# Altium PCB SPI-主板-开关.PcbDoc (part 5 of 11)
Units mm, origin at the board's own origin, x right, y up, seen from the top; angles counter-clockwise.
Board outline 97.69 x 103.45 mm, 2 copper layers (Top Layer, Bottom Layer); 86 components, 63 nets, 260 pads, 250 vias.
Unrouted connection lines stored in the file: 6.
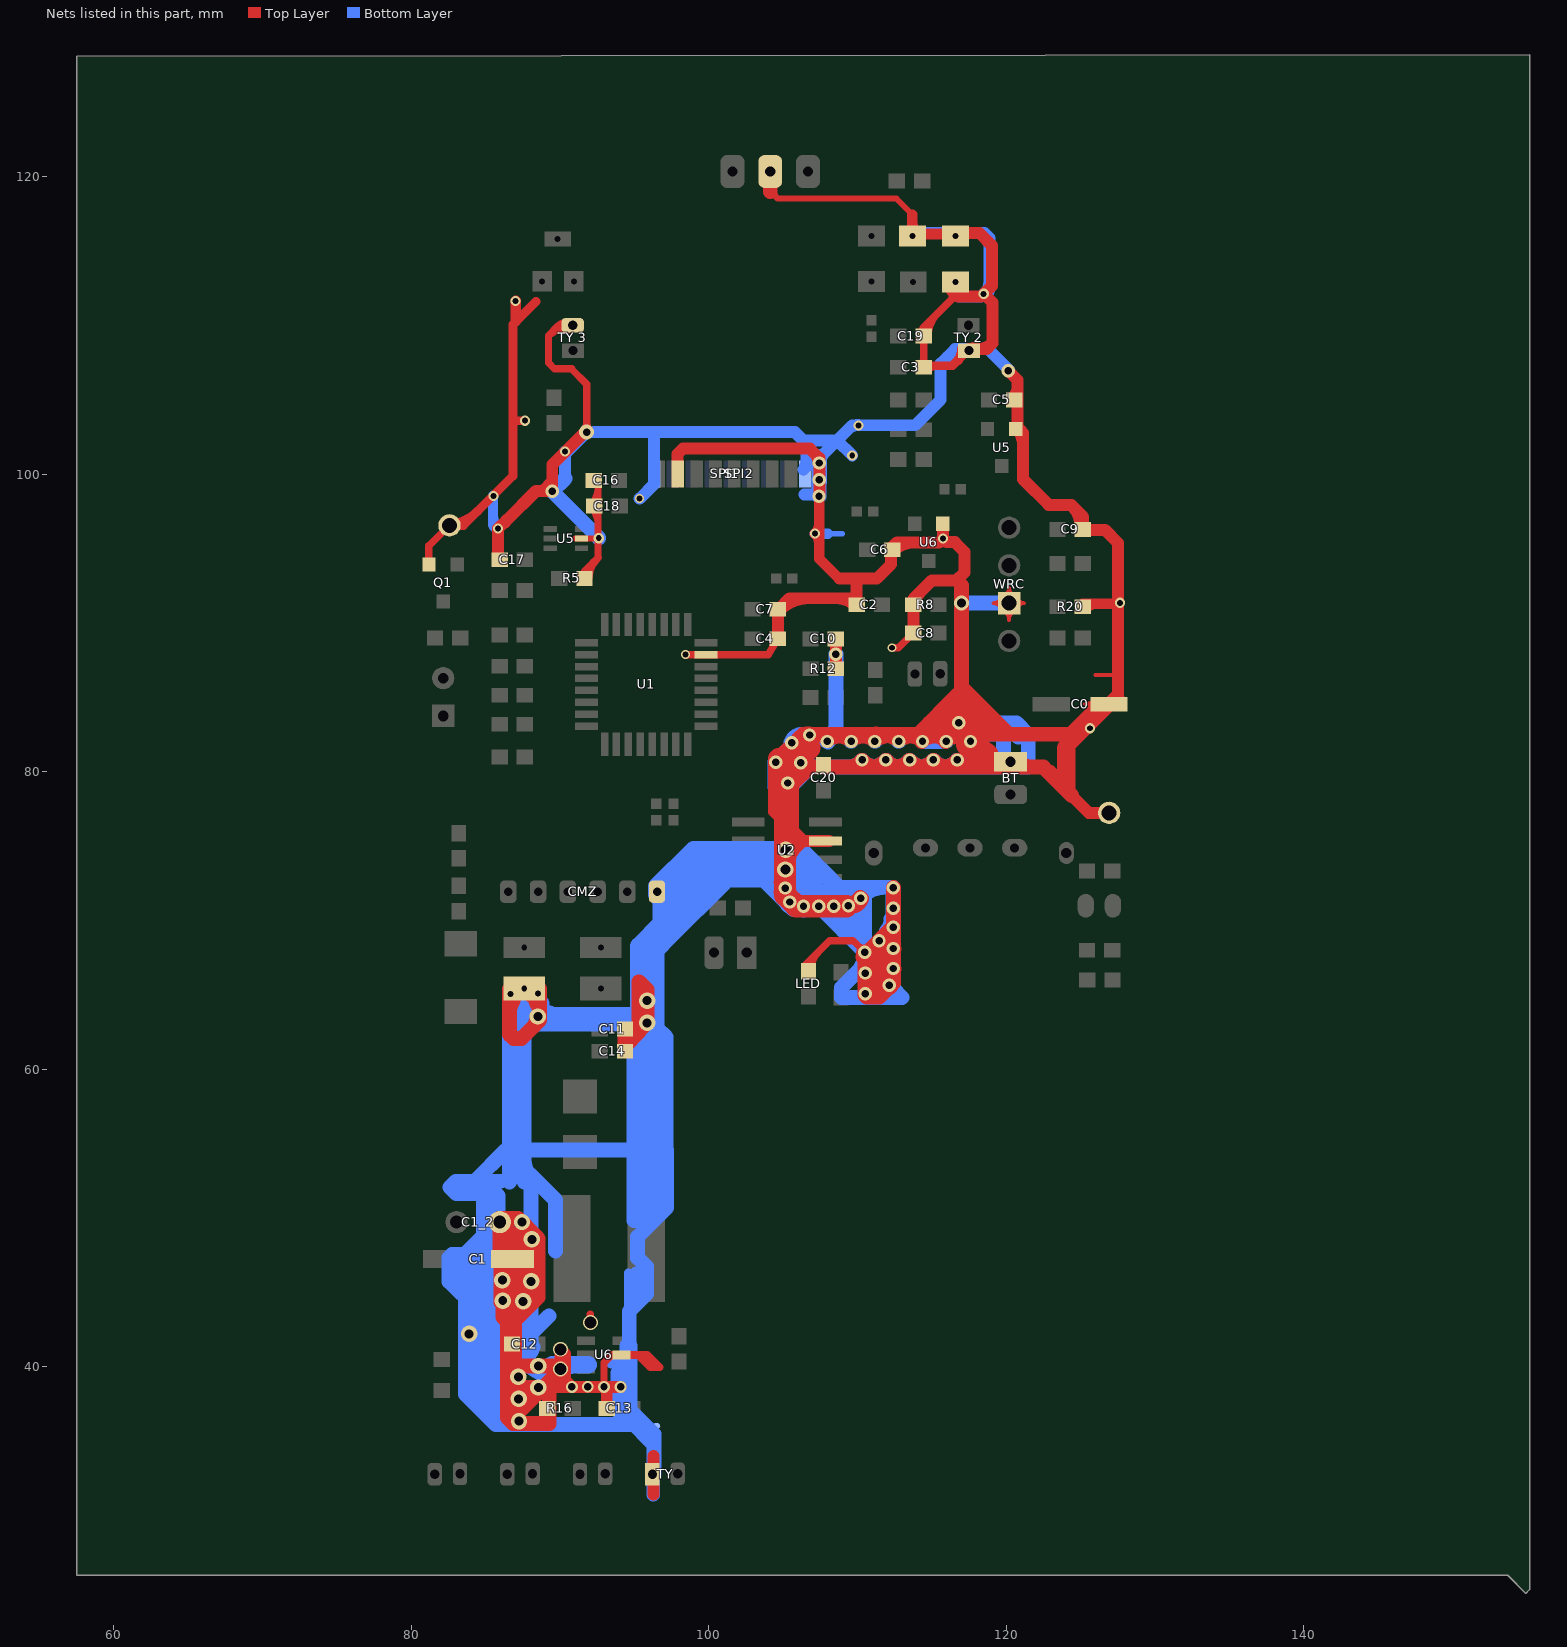
[diagram p5: the nets of this part, all layers, seen from the top]

## Via types
v1: diameter 0.9, hole 0.5, Top Layer to Bottom Layer, 104 vias
v2: diameter 0.68, hole 0.4, Top Layer to Bottom Layer, 100 vias
v3: diameter 1.1, hole 0.6, Top Layer to Bottom Layer, tented both sides, 16 vias
v4: diameter 1, hole 0.8, Top Layer to Bottom Layer, tented both sides, 8 vias
v5: diameter 1, hole 0.6, Top Layer to Bottom Layer, 4 vias
v6: diameter 0.8, hole 0.5, Top Layer to Bottom Layer, 4 vias
v7: diameter 0.7, hole 0.4, Top Layer to Bottom Layer, 4 vias
v8: diameter 0.6, hole 0.4, Top Layer to Bottom Layer, 3 vias
v9: diameter 1.1, hole 0.68, Top Layer to Bottom Layer, 2 vias
v10: diameter 0.8, hole 0.4, Top Layer to Bottom Layer, 2 vias
v11: diameter 1, hole 0.5, Top Layer to Bottom Layer, 1 vias
v12: diameter 0.9, hole 0.6, Top Layer to Bottom Layer, tented bottom, 1 vias
v13: diameter 1.2, hole 0.68, Top Layer to Bottom Layer, 1 vias

## Nets (pads, with @x,y where several pads share a name; then routed paths per layer and width w, separated by ;. In a path a pad name is that pad's centre, name@x,y a point inside that pad or via, vN(x,y) a via of type N, cw(c..) or ccw(c..) an arc to the next point about the centre after c; other vN are vias at no path point) (continued)
GND: (continued)
  Top Layer w0.5: Q1.2@81.194,93.782 81.194,95.189 pad.4@82.575,96.571 ; 90.855,109.919 89.826,109.919 89.23,109.323 ; R5.1@91.65,93 91.65,93.479 92.583,94.412 ; v11(91.796,102.845) 91.796,106.07 90.78,107.086 89.637,107.086 89.23,107.493 89.23,109.323 ; R5.1@91.938,93.077 cw(c92.56,93.277) 92.098,93.739 ; v4(92.05,42.977) 92.05,43.536 ; 92.56,94.412 C16.1@92.56,99.441 ; v6(92.964,38.643) 92.964,40.272 93.496,40.804 95.873,40.804 96.723,39.954 96.063,39.954 95.25,40.767 U6.2@94.539,40.767 ; v1@104.369,80.366 104.572,80.366 v1@106.731,82.525 ; v1@104.582,80.835 ccw(c104.743,81.333) 105.112,80.963 ; 104.648,72.252 104.648,76.86 104.242,77.267 v1@104.242,80.518 ; v1@104.711,80.706 cw(c105.209,80.867) 104.839,81.236 ; v1@104.716,80.6 cw(c105.731,80.363) 105.21,81.266 ; 104.963,72.83 ccw(c105.485,72.83) v1@105.247,72.365 ; 105.134,81.431 cw(c105.657,81.194) v1@105.606,81.767 ; 105.27,81.374 ccw(c104.9,81.744) v1@105.397,81.904 ; v1@105.557,82.163 ccw(c105.422,83.014) 106.167,82.583 ; v1@105.694,82.135 ccw(c105.921,82.494) 106.171,82.151 ; 106.104,82.335 ccw(c106.45,81.735) v1@105.781,81.914 ; 106.298,82.184 cw(c106.573,81.962) v1@106.706,82.289 ; LED.1@106.45,66.75 106.45,66.953 108.153,68.656 109.703,68.656 v1(110.49,67.869) ; LED.1@106.838,66.727 cw(c107.46,66.927) 106.998,67.389 ; v1@109.753,81.951 cw(c110.218,81.713) 110.218,82.235 ; v8(112.319,88.341) 112.759,88.341 C8.1@113.75,89.332 ; pad.0@113.65,116.032 pad.0@113.7,116.032 ; pad.0@113.855,116.032 pad.0@116.6,116.032 ; v1@114.553,81.951 cw(c115.018,81.713) 115.018,82.235 ; pad.0@116.4,112.59 pad.0@116.6,112.932 116.605,112.831 116.605,112.822 pad.0@116.4,112.822 ; 116.459,82.779 117.831,82.779 ; 118.059,82.525 116.205,82.525 ; 118.059,82.537 116.218,82.537 ; 123.034,80.217 124.409,78.842 ; 124.206,81.839 124.409,81.636 124.409,78.842 ; 124.231,82.525 124.117,82.639 ; 124.409,78.41 124.409,78.842 ; 125.12,83.033 124.003,81.915 124.003,82.525 ; C0.2@126.924,84.633 C0.2@126.913,84.622 ; 89.23,109.323 cw(c90.2,108.353) 90.487,109.694 ; 89.23,109.323 cw(c90.2,108.353) 90.487,109.694 ; 89.23,109.323 cw(c90.2,108.353) 90.487,109.694 ; 89.88,109.973 cw(c90.429,109.424) 90.592,110.183 ; 89.88,109.973 cw(c90.429,109.424) 90.592,110.183 ; 89.88,109.973 cw(c90.429,109.424) 90.592,110.183 ; 89.98,109.919 ccw(c89.98,110.474) 90.373,110.082 ; 89.98,109.919 cw(c89.98,109.364) 90.373,109.757 ; 89.98,109.919 ccw(c89.98,110.474) 90.373,110.082 ; 89.98,109.919 cw(c89.98,109.364) 90.373,109.757 ; 89.98,109.919 ccw(c89.98,110.474) 90.373,110.082 ; 89.98,109.919 cw(c89.98,109.364) 90.373,109.757 ; R5.1@91.575,93.217 ccw(c90.861,94.453) 92.24,94.084 ; R5.1@91.575,93.217 ccw(c90.861,94.453) 92.24,94.084 ; R5.1@91.575,93.217 ccw(c90.861,94.453) 92.24,94.084 ; v11@91.619,103.021 ccw(c91.192,103.448) 91.796,103.448 ; v11@91.619,103.021 ccw(c91.192,103.448) 91.796,103.448 ; v11@91.619,103.021 ccw(c91.192,103.448) 91.796,103.448 ; 91.796,103.448 ccw(c92.399,103.448) v11@91.972,103.021 ; 91.796,103.448 ccw(c92.399,103.448) v11@91.972,103.021 ; 91.796,103.448 ccw(c92.399,103.448) v11@91.972,103.021 ; R5.1@91.95,93 cw(c93.83,93) 92.501,94.329 ; R5.1@91.95,93 cw(c93.83,93) 92.501,94.329 ; R5.1@91.95,93 cw(c93.83,93) 92.501,94.329 ; C18.1@92.19,97.689 cw(c91.298,96.797) 92.56,96.797 ; C18.1@92.19,97.689 cw(c91.298,96.797) 92.56,96.797 ; C18.1@92.19,97.689 cw(c91.298,96.797) 92.56,96.797 ; C18.1@92.19,98.043 ccw(c91.298,98.935) 92.56,98.935 ; C18.1@92.19,98.043 ccw(c91.298,98.935) 92.56,98.935 ; C18.1@92.19,98.043 ccw(c91.298,98.935) 92.56,98.935 ; 92.447,97.245 cw(c92.738,97.413) C18.1@92.526,97.673 ; 92.447,97.245 cw(c92.738,97.413) C18.1@92.526,97.673 ; 92.447,97.245 cw(c92.738,97.413) C18.1@92.526,97.673 ; 92.447,98.488 ccw(c92.738,98.32) C18.1@92.526,98.06 ; 92.447,98.488 ccw(c92.738,98.32) C18.1@92.526,98.06 ; 92.447,98.488 ccw(c92.738,98.32) C18.1@92.526,98.06 ; 104.242,79.488 cw(c105.678,79.488) v1@104.662,80.504 ; 104.242,79.488 cw(c105.678,79.488) v1@104.662,80.504 ; 104.242,79.488 cw(c105.678,79.488) v1@104.662,80.504 ; v1@104.242,80.518 104.242,80.772 106.248,82.779 ; v1@104.242,80.518 106.248,82.525 ; 104.346,79.956 ccw(c103.834,80.252) v1@104.347,80.546 ; 104.346,79.956 ccw(c103.834,80.252) v1@104.347,80.546 ; 104.346,79.956 ccw(c103.834,80.252) v1@104.347,80.546 ; v1@104.421,80.818 ccw(c103.85,81.808) 104.953,81.512 ; v1@104.421,80.818 ccw(c103.85,81.808) 104.953,81.512 ; v1@104.421,80.818 ccw(c103.85,81.808) 104.953,81.512 ; v1@104.469,80.838 ccw(c104.097,82.226) 105.342,81.508 ; v1@104.469,80.838 ccw(c104.097,82.226) 105.342,81.508 ; v1@104.469,80.838 ccw(c104.097,82.226) 105.342,81.508 ; v1@104.521,80.845 ccw(c104.521,82.125) 105.426,81.22 ; v1@104.521,80.845 ccw(c104.521,82.125) 105.426,81.22 ; v1@104.521,80.845 ccw(c104.521,82.125) 105.426,81.22 ; 104.599,72.572 ccw(c104.969,72.786) v1@105.097,72.378 ; 104.599,72.572 ccw(c104.969,72.786) v1@105.097,72.378 ; 104.599,72.572 ccw(c104.969,72.786) v1@105.097,72.378 ; 104.603,71.917 cw(c105.345,71.772) v1@105.032,72.46 ; 104.603,71.917 cw(c105.345,71.772) v1@105.032,72.46 ; 104.603,71.917 cw(c105.345,71.772) v1@105.032,72.46 ; 104.603,71.917 cw(c105.345,71.772) v1@105.032,72.46 ; 104.603,71.917 cw(c105.345,71.772) v1@105.032,72.46 ; 104.603,71.917 cw(c105.345,71.772) v1@105.032,72.46 ; 104.626,72.034 cw(c105.177,71.926) v1@105.132,72.486 ; 104.626,72.034 cw(c105.177,71.926) v1@105.132,72.486 ; 104.626,72.034 cw(c105.177,71.926) v1@105.132,72.486 ; 104.626,72.034 cw(c105.177,71.926) v1@105.132,72.486 ; 104.626,72.034 cw(c105.177,71.926) v1@105.132,72.486 ; 104.626,72.034 cw(c105.177,71.926) v1@105.132,72.486 ; 104.635,73.948 ccw(c105.028,74.175) v9@105.105,73.727 ; 104.635,73.948 ccw(c105.028,74.175) v9@105.105,73.727 ; 104.635,73.948 ccw(c105.028,74.175) v9@105.105,73.727 ; 104.638,74.197 cw(c105.089,73.937) v9@105.148,74.454 ; 104.638,74.197 cw(c105.089,73.937) v9@105.148,74.454 ; 104.638,74.197 cw(c105.089,73.937) v9@105.148,74.454 ; 104.638,75.307 ccw(c105.089,75.568) v9@105.148,75.05 ; 104.638,75.307 ccw(c105.089,75.568) v9@105.148,75.05 ; 104.638,75.307 ccw(c105.089,75.568) v9@105.148,75.05 ; 104.648,72.147 cw(c105.772,72.147) v9@105.286,73.161 ; 104.648,72.147 cw(c105.772,72.147) v9@105.286,73.161 ; 104.648,72.147 cw(c105.772,72.147) v9@105.286,73.161 ; 104.648,72.689 ccw(c105.658,72.689) v1@104.944,71.975 ; 104.648,72.689 ccw(c105.658,72.689) v1@104.944,71.975 ; 104.648,72.689 ccw(c105.658,72.689) v1@104.944,71.975 ; 104.648,72.74 cw(c107.193,72.74) v9@105.394,74.54 ; 104.648,72.74 cw(c107.193,72.74) v9@105.394,74.54 ; 104.648,72.74 cw(c107.193,72.74) v9@105.394,74.54 ; 104.648,72.942 cw(c105.391,72.942) v9@105.069,73.612 ; 104.648,72.942 cw(c105.391,72.942) v9@105.069,73.612 ; 104.648,72.942 cw(c105.391,72.942) v9@105.069,73.612 ; 104.648,73.896 ccw(c106.865,73.896) v1@105.297,72.328 ; 104.648,73.896 ccw(c106.865,73.896) v1@105.297,72.328 ; 104.648,73.896 ccw(c106.865,73.896) v1@105.297,72.328 ; 104.648,73.947 cw(c105.986,73.947) v9@105.04,74.894 ; 104.648,73.947 cw(c105.986,73.947) v9@105.04,74.894 ; 104.648,73.947 cw(c105.986,73.947) v9@105.04,74.894 ; 104.648,74.175 ccw(c105.9,74.175) v9@105.015,73.29 ; 104.648,74.175 ccw(c105.9,74.175) v9@105.015,73.29 ; 104.648,74.175 ccw(c105.9,74.175) v9@105.015,73.29 ; 104.648,75.382 ccw(c107.107,75.382) v9@105.368,73.644 ; 104.648,75.382 ccw(c107.107,75.382) v9@105.368,73.644 ; 104.648,75.382 ccw(c107.107,75.382) v9@105.368,73.644 ; 104.648,75.557 ccw(c105.986,75.557) v9@105.04,74.611 ; 104.648,75.557 ccw(c105.986,75.557) v9@105.04,74.611 ; 104.648,75.557 ccw(c105.986,75.557) v9@105.04,74.611 ; 104.648,76.764 ccw(c107.193,76.764) v9@105.394,74.964 ; 104.648,76.764 ccw(c107.193,76.764) v9@105.394,74.964 ; 104.648,76.764 ccw(c107.193,76.764) v9@105.394,74.964 ; 104.662,75.279 ccw(c105.689,75.417) v9@105.06,74.593 ; 104.662,75.279 ccw(c105.689,75.417) v9@105.06,74.593 ; 104.662,75.279 ccw(c105.689,75.417) v9@105.06,74.593 ; 104.684,72.997 cw(c105.578,72.87) v9@105.036,73.591 ; 104.684,72.997 cw(c105.578,72.87) v9@105.036,73.591 ; 104.684,72.997 cw(c105.578,72.87) v9@105.036,73.591 ; 104.684,72.997 cw(c105.578,72.87) v9@105.036,73.591 ; 104.684,72.997 cw(c105.578,72.87) v9@105.036,73.591 ; 104.684,72.997 cw(c105.578,72.87) v9@105.036,73.591 ; v1@104.694,80.545 cw(c105.684,79.974) 105.388,81.077 ; v1@104.694,80.545 cw(c105.684,79.974) 105.388,81.077 ; v1@104.694,80.545 cw(c105.684,79.974) 105.388,81.077 ; v1@104.721,80.645 cw(c105.572,80.645) 104.97,81.247 ; v1@104.721,80.645 cw(c106.185,80.645) 105.15,81.68 ; v1@104.721,80.645 cw(c105.572,80.645) 104.97,81.247 ; v1@104.721,80.645 cw(c106.185,80.645) 105.15,81.68 ; v1@104.721,80.645 cw(c105.572,80.645) 104.97,81.247 ; v1@104.721,80.645 cw(c106.185,80.645) 105.15,81.68 ; 104.81,72.753 ccw(c104.54,73.068) v9@104.898,73.279 ; 104.81,72.753 ccw(c104.54,73.068) v9@104.898,73.279 ; 104.81,72.753 ccw(c104.54,73.068) v9@104.898,73.279 ; v9@104.815,74.601 cw(c103.792,74.01) v9@104.88,73.549 ; v9@104.815,74.601 cw(c103.792,74.01) v9@104.88,73.549 ; v9@104.815,74.601 cw(c103.792,74.01) v9@104.88,73.549 ; v9@104.818,73.544 ccw(c103.716,74.18) v9@104.902,74.643 ; v9@104.818,73.544 ccw(c103.716,74.18) v9@104.902,74.643 ; v9@104.818,73.544 ccw(c103.716,74.18) v9@104.902,74.643 ; 104.818,75.96 cw(c103.716,75.324) v9@104.902,74.861 ; 104.818,75.96 cw(c103.716,75.324) v9@104.902,74.861 ; 104.818,75.96 cw(c103.716,75.324) v9@104.902,74.861 ; v1@104.833,80.627 ccw(c103.495,81.966) v1@105.388,81.966 ; v1@104.833,80.627 ccw(c103.495,81.966) v1@105.388,81.966 ; v1@104.833,80.627 ccw(c103.495,81.966) v1@105.388,81.966 ; v9@104.849,73.105 cw(c103.859,72.534) v1@104.963,72.239 ; v9@104.849,73.105 cw(c103.859,72.534) v1@104.963,72.239 ; v9@104.849,73.105 cw(c103.859,72.534) v1@104.963,72.239 ; 104.856,81.171 cw(c105.974,80.526) v1@105.64,81.773 ; 104.856,81.171 cw(c105.974,80.526) v1@105.64,81.773 ; 104.856,81.171 cw(c105.974,80.526) v1@105.64,81.773 ; 104.856,81.171 cw(c105.974,80.526) v1@105.64,81.773 ; 104.856,81.171 cw(c105.974,80.526) v1@105.64,81.773 ; 104.856,81.171 cw(c105.974,80.526) v1@105.64,81.773 ; 104.965,81.383 ccw(c104.527,82.141) v1@105.39,81.998 ; 104.965,81.383 ccw(c104.527,82.141) v1@105.39,81.998 ; 104.965,81.383 ccw(c104.527,82.141) v1@105.39,81.998 ; 104.965,81.383 ccw(c104.527,82.141) v1@105.39,81.998 ; 104.986,81.517 cw(c105.588,80.915) v1@105.588,81.766 ; 104.986,81.517 cw(c105.588,80.915) v1@105.588,81.766 ; 104.986,81.517 cw(c105.588,80.915) v1@105.588,81.766 ; 105.009,81.54 cw(c106.782,79.767) v1@106.782,82.274 ; 105.009,81.54 cw(c106.782,79.767) v1@106.782,82.274 ; 105.009,81.54 cw(c106.782,79.767) v1@106.782,82.274 ; 105.082,81.562 cw(c105.458,81.345) v1@105.547,81.77 ; 105.082,81.562 cw(c105.458,81.345) v1@105.547,81.77 ; 105.082,81.562 cw(c105.458,81.345) v1@105.547,81.77 ; 105.082,81.562 cw(c105.458,81.345) v1@105.547,81.77 ; 105.082,81.562 cw(c105.458,81.345) v1@105.547,81.77 ; 105.082,81.562 cw(c105.458,81.345) v1@105.547,81.77 ; 105.156,81.099 cw(c106.259,80.803) v1@105.688,81.793 ; 105.156,81.099 cw(c106.259,80.803) v1@105.688,81.793 ; 105.156,81.099 cw(c106.259,80.803) v1@105.688,81.793 ; 105.175,81.451 ccw(c104.66,81.966) v1@105.388,81.966 ; 105.175,81.451 ccw(c104.66,81.966) v1@105.388,81.966 ; 105.175,81.451 ccw(c104.66,81.966) v1@105.388,81.966 ; 105.181,81.669 cw(c105.489,81.26) v1@105.56,81.768 ; 105.181,81.669 cw(c105.489,81.26) v1@105.56,81.768 ; 105.181,81.669 cw(c105.489,81.26) v1@105.56,81.768 ; 105.214,81.694 ccw(c104.941,82.056) v1@105.39,81.993 ; 105.214,81.694 ccw(c104.941,82.056) v1@105.39,81.993 ; 105.214,81.694 ccw(c104.941,82.056) v1@105.39,81.993 ; v9@105.255,73.839 cw(c105.721,74.11) v9@105.374,74.523 ; v9@105.255,73.839 cw(c105.721,74.11) v9@105.374,74.523 ; v9@105.255,73.839 cw(c105.721,74.11) v9@105.374,74.523 ; v9@105.293,74.37 ccw(c105.821,74.058) v9@105.374,73.637 ; v9@105.293,74.37 ccw(c105.821,74.058) v9@105.374,73.637 ; v9@105.293,74.37 ccw(c105.821,74.058) v9@105.374,73.637 ; v9@105.293,74.37 ccw(c105.821,74.058) v9@105.374,73.637 ; v9@105.293,74.37 ccw(c105.821,74.058) v9@105.374,73.637 ; v9@105.293,74.37 ccw(c105.821,74.058) v9@105.374,73.637 ; v1@105.443,81.719 cw(c106.782,80.381) v1@106.782,82.274 ; v1@105.443,81.719 cw(c106.782,80.381) v1@106.782,82.274 ; v1@105.443,81.719 cw(c106.782,80.381) v1@106.782,82.274 ; v1@105.541,81.669 ccw(c105.631,82.237) 106.037,81.831 ; v1@105.541,81.669 ccw(c105.631,82.237) 106.037,81.831 ; v1@105.541,81.669 ccw(c105.631,82.237) 106.037,81.831 ; v1@105.588,82.166 ccw(c105.588,82.894) 106.103,82.379 ; v1@105.588,82.166 ccw(c105.588,82.894) 106.103,82.379 ; v1@105.588,82.166 ccw(c105.588,82.894) 106.103,82.379 ; v1@105.619,82.163 ccw(c105.82,83.435) v1@106.731,82.525 ; v1@105.619,82.163 ccw(c105.82,83.435) v1@106.731,82.525 ; v1@105.619,82.163 ccw(c105.82,83.435) v1@106.731,82.525 ; v1@105.674,82.146 ccw(c105.926,82.679) 106.221,82.169 ; v1@105.674,82.146 ccw(c105.926,82.679) 106.221,82.169 ; v1@105.674,82.146 ccw(c105.926,82.679) 106.221,82.169 ; 105.687,81.481 ccw(c105.202,81.966) v1@105.888,81.966 ; 105.687,81.481 ccw(c105.202,81.966) v1@105.888,81.966 ; 105.687,81.481 ccw(c105.202,81.966) v1@105.888,81.966 ; v1@105.689,82.138 ccw(c105.937,82.561) 106.06,82.086 ; v1@105.689,82.138 ccw(c105.937,82.561) 106.06,82.086 ; v1@105.689,82.138 ccw(c105.937,82.561) 106.06,82.086 ; v1@105.743,81.84 cw(c106.631,81.121) v1@106.512,82.257 ; v1@105.743,81.84 cw(c106.631,81.121) v1@106.512,82.257 ; v1@105.743,81.84 cw(c106.631,81.121) v1@106.512,82.257 ; v1@105.76,81.864 cw(c106.171,81.623) 106.051,82.084 ; v1@105.76,81.864 cw(c106.171,81.623) 106.051,82.084 ; v1@105.76,81.864 cw(c106.171,81.623) 106.051,82.084 ; v1@105.781,81.914 cw(c107.015,81.583) 106.376,82.69 ; v1@105.781,81.914 cw(c107.015,81.583) 106.376,82.69 ; v1@105.781,81.914 cw(c107.015,81.583) 106.376,82.69 ; v1@105.783,82.01 cw(c106.186,82.102) 105.979,82.46 ; v1@105.783,82.01 cw(c106.186,82.102) 105.979,82.46 ; v1@105.783,82.01 cw(c106.186,82.102) 105.979,82.46 ; v1@105.788,81.966 cw(c106.639,81.966) 106.037,82.567 ; v1@105.788,81.966 cw(c106.639,81.966) 106.037,82.567 ; v1@105.788,81.966 cw(c106.639,81.966) 106.037,82.567 ; 105.863,82.393 cw(c106.782,81.474) v1@106.782,82.774 ; 105.863,82.393 cw(c106.782,81.474) v1@106.782,82.774 ; 105.863,82.393 cw(c106.782,81.474) v1@106.782,82.774 ; v1@105.909,82.222 cw(c106.343,81.788) v1@106.674,82.305 ; v1@105.909,82.222 cw(c106.343,81.788) v1@106.674,82.305 ; v1@105.909,82.222 cw(c106.343,81.788) v1@106.674,82.305 ; v1@105.909,82.222 cw(c106.343,81.788) v1@106.674,82.305 ; v1@105.915,82.042 ccw(c105.619,83.145) v1@106.608,82.574 ; v1@105.915,82.042 ccw(c105.619,83.145) v1@106.608,82.574 ; v1@105.915,82.042 ccw(c105.619,83.145) v1@106.608,82.574 ; v1@105.915,82.042 ccw(c105.619,83.145) v1@106.608,82.574 ; v1@105.915,82.042 ccw(c105.619,83.145) v1@106.608,82.574 ; v1@105.915,82.042 ccw(c105.619,83.145) v1@106.608,82.574 ; 106.131,82.111 ccw(c105.829,82.898) v1@106.599,82.555 ; 106.131,82.111 ccw(c105.829,82.898) v1@106.599,82.555 ; 106.131,82.111 ccw(c105.829,82.898) v1@106.599,82.555 ; 106.131,82.111 ccw(c105.829,82.898) v1@106.599,82.555 ; 106.188,82.211 cw(c106.542,81.599) v1@106.729,82.281 ; 106.188,82.211 cw(c106.542,81.599) v1@106.729,82.281 ; 106.188,82.211 cw(c106.542,81.599) v1@106.729,82.281 ; 106.188,82.211 cw(c106.542,81.599) v1@106.729,82.281 ; 106.188,82.211 cw(c106.542,81.599) v1@106.729,82.281 ; 106.188,82.211 cw(c106.542,81.599) v1@106.729,82.281 ; 106.248,82.525 cw(c106.248,82.032) v1@106.628,82.346 ; 106.248,82.525 cw(c106.248,82.032) v1@106.628,82.346 ; 106.248,82.525 cw(c106.248,82.032) v1@106.628,82.346 ; 106.248,82.525 v1@106.731,82.525 ; 106.248,82.779 cw(c106.248,82.444) v1@106.582,82.463 ; 106.248,82.779 cw(c106.248,82.444) v1@106.582,82.463 ; 106.248,82.779 cw(c106.248,82.444) v1@106.582,82.463 ; 106.248,82.779 115.265,82.779 116.218,82.779 116.218,82.715 ; 106.267,82.061 cw(c106.782,81.546) v1@106.782,82.274 ; 106.267,82.061 cw(c106.782,81.546) v1@106.782,82.274 ; 106.267,82.061 cw(c106.782,81.546) v1@106.782,82.274 ; 106.296,82.573 cw(c106.782,82.088) v1@106.782,82.774 ; 106.296,82.573 cw(c106.782,82.088) v1@106.782,82.774 ; 106.296,82.573 cw(c106.782,82.088) v1@106.782,82.774 ; 106.348,82.662 cw(c106.686,82.324) v1@106.943,82.727 ; 106.348,82.662 cw(c106.686,82.324) v1@106.943,82.727 ; 106.348,82.662 cw(c106.686,82.324) v1@106.943,82.727 ; 106.348,82.662 cw(c106.686,82.324) v1@106.943,82.727 ; v1@106.731,82.525 cw(c106.731,81.249) v1@107.807,81.935 ; v1@106.731,82.525 cw(c106.731,81.249) v1@107.807,81.935 ; v1@106.731,82.525 cw(c106.731,81.249) v1@107.807,81.935 ; v1@106.731,82.525 v1@106.743,82.537 ; v1@106.731,82.525 111.239,82.525 ; v1@106.744,82.537 cw(c106.744,81.299) v1@107.804,81.939 ; v1@106.744,82.537 cw(c106.744,81.299) v1@107.804,81.939 ; v1@106.744,82.537 cw(c106.744,81.299) v1@107.804,81.939 ; v1@106.743,82.537 111.252,82.537 ; LED.1@106.85,66.65 cw(c108.547,66.65) 107.347,67.85 ; LED.1@106.85,66.65 cw(c108.547,66.65) 107.347,67.85 ; LED.1@106.85,66.65 cw(c108.547,66.65) 107.347,67.85 ; v1@106.871,82.652 ccw(c107.173,83.253) 107.509,82.671 ; v1@106.871,82.652 ccw(c107.173,83.253) 107.509,82.671 ; v1@106.871,82.652 ccw(c107.173,83.253) 107.509,82.671 ; v1@106.889,82.305 cw(c107.172,81.861) 107.308,82.37 ; v1@106.889,82.305 cw(c107.172,81.861) 107.308,82.37 ; v1@106.889,82.305 cw(c107.172,81.861) 107.308,82.37 ; v1@106.889,82.305 cw(c107.172,81.861) 107.308,82.37 ; v1@106.889,82.305 cw(c107.172,81.861) 107.308,82.37 ; v1@106.889,82.305 cw(c107.172,81.861) 107.308,82.37 ; v1@106.906,82.317 cw(c107.168,81.989) 107.277,82.394 ; v1@106.906,82.317 cw(c107.168,81.989) 107.277,82.394 ; v1@106.906,82.317 cw(c107.168,81.989) 107.277,82.394 ; v1@106.906,82.317 cw(c107.168,81.989) 107.277,82.394 ; v1@106.906,82.317 cw(c107.168,81.989) 107.277,82.394 ; v1@106.906,82.317 cw(c107.168,81.989) 107.277,82.394 ; v1@106.923,82.332 cw(c107.387,81.868) 107.387,82.525 ; v1@106.923,82.332 cw(c107.418,81.838) 107.418,82.537 ; v1@106.923,82.332 cw(c108,81.255) 108,82.779 ; v1@106.923,82.332 cw(c107.387,81.868) 107.387,82.525 ; v1@106.923,82.332 cw(c107.418,81.838) 107.418,82.537 ; v1@106.923,82.332 cw(c108,81.255) 108,82.779 ; v1@106.923,82.332 cw(c107.387,81.868) 107.387,82.525 ; v1@106.923,82.332 cw(c107.418,81.838) 107.418,82.537 ; v1@106.923,82.332 cw(c108,81.255) 108,82.779 ; 107.332,82.369 ccw(c107.745,82.82) v1@107.918,82.234 ; 107.332,82.369 ccw(c107.745,82.82) v1@107.918,82.234 ; 107.332,82.369 ccw(c107.745,82.82) v1@107.918,82.234 ; 107.347,82.378 ccw(c107.759,82.806) v1@107.921,82.234 ; 107.347,82.378 ccw(c107.759,82.806) v1@107.921,82.234 ; 107.347,82.378 ccw(c107.759,82.806) v1@107.921,82.234 ; 107.629,82.537 cw(c107.629,81.833) v1@108.232,82.197 ; 107.629,82.537 cw(c107.629,81.833) v1@108.232,82.197 ; 107.629,82.537 cw(c107.629,81.833) v1@108.232,82.197 ; 107.642,82.525 cw(c107.642,81.83) v1@108.228,82.203 ; 107.642,82.525 cw(c107.642,81.83) v1@108.228,82.203 ; 107.642,82.525 cw(c107.642,81.83) v1@108.228,82.203 ; v1@107.751,82.242 cw(c108.246,81.801) 108.566,82.38 ; v1@107.751,82.242 cw(c108.246,81.801) 108.566,82.38 ; v1@107.751,82.242 cw(c108.246,81.801) 108.566,82.38 ; v1@107.751,82.242 cw(c108.246,81.801) 108.566,82.38 ; v1@107.751,82.242 cw(c108.246,81.801) 108.566,82.38 ; v1@107.751,82.242 cw(c108.246,81.801) 108.566,82.38 ; v1@107.752,82.243 cw(c108.237,81.806) 108.547,82.38 ; v1@107.752,82.243 cw(c108.237,81.806) 108.547,82.38 ; v1@107.752,82.243 cw(c108.237,81.806) 108.547,82.38 ; v1@107.752,82.243 cw(c108.237,81.806) 108.547,82.38 ; v1@107.752,82.243 cw(c108.237,81.806) 108.547,82.38 ; v1@107.752,82.243 cw(c108.237,81.806) 108.547,82.38 ; v1@107.763,82.254 cw(c108.416,81.601) 108.416,82.525 ; v1@107.763,82.254 cw(c108.447,81.571) 108.447,82.537 ; v1@107.763,82.254 cw(c108.416,81.601) 108.416,82.525 ; v1@107.763,82.254 cw(c108.447,81.571) 108.447,82.537 ; v1@107.763,82.254 cw(c108.416,81.601) 108.416,82.525 ; v1@107.763,82.254 cw(c108.447,81.571) 108.447,82.537 ; 107.897,82.537 cw(c107.897,80.363) v1@109.434,81.901 ; 107.897,82.537 cw(c107.897,80.363) v1@109.434,81.901 ; 107.897,82.537 cw(c107.897,80.363) v1@109.434,81.901 ; 107.927,82.525 cw(c107.927,80.394) v1@109.434,81.901 ; 107.927,82.525 cw(c107.927,80.394) v1@109.434,81.901 ; 107.927,82.525 cw(c107.927,80.394) v1@109.434,81.901 ; v1@108.027,82.235 ccw(c108.323,83.339) 108.894,82.349 ; v1@108.027,82.235 ccw(c108.323,83.339) 108.894,82.349 ; v1@108.027,82.235 ccw(c108.323,83.339) 108.894,82.349 ; v1@108.027,82.235 ccw(c108.323,83.339) 108.894,82.349 ; v1@108.027,82.235 ccw(c108.323,83.339) 108.894,82.349 ; v1@108.027,82.235 ccw(c108.323,83.339) 108.894,82.349 ; v1@108.117,81.901 cw(c109.623,80.394) 109.623,82.525 ; v1@108.117,81.901 cw(c109.654,80.363) 109.654,82.537 ; v1@108.117,81.901 cw(c109.623,80.394) 109.623,82.525 ; v1@108.117,81.901 cw(c109.654,80.363) 109.654,82.537 ; v1@108.117,81.901 cw(c109.623,80.394) 109.623,82.525 ; v1@108.117,81.901 cw(c109.654,80.363) 109.654,82.537 ; v1@108.124,81.908 cw(c108.723,81.369) 109.106,82.078 ; v1@108.124,81.909 cw(c108.725,81.374) 109.114,82.077 ; v1@108.124,81.908 cw(c108.723,81.369) 109.106,82.078 ; v1@108.124,81.909 cw(c108.725,81.374) 109.114,82.077 ; v1@108.124,81.908 cw(c108.723,81.369) 109.106,82.078 ; v1@108.124,81.909 cw(c108.725,81.374) 109.114,82.077 ; v1@108.124,81.908 cw(c108.723,81.369) 109.106,82.078 ; v1@108.124,81.909 cw(c108.725,81.374) 109.114,82.077 ; v1@108.124,81.908 cw(c108.723,81.369) 109.106,82.078 ; v1@108.124,81.909 cw(c108.725,81.374) 109.114,82.077 ; v1@108.124,81.908 cw(c108.723,81.369) 109.106,82.078 ; v1@108.124,81.909 cw(c108.725,81.374) 109.114,82.077 ; v1@108.161,82.116 cw(c108.509,82.253) 108.322,82.577 ; v1@108.161,82.116 cw(c108.509,82.253) 108.322,82.577 ; v1@108.161,82.116 cw(c108.509,82.253) 108.322,82.577 ; v1@108.164,82.108 cw(c108.542,82.241) 108.341,82.588 ; v1@108.164,82.108 cw(c108.542,82.241) 108.341,82.588 ; v1@108.164,82.108 cw(c108.542,82.241) 108.341,82.588 ; 108.436,82.077 cw(c108.826,81.374) v1@109.426,81.909 ; 108.436,82.077 cw(c108.826,81.374) v1@109.426,81.909 ; 108.436,82.077 cw(c108.826,81.374) v1@109.426,81.909 ; 108.445,82.078 cw(c108.828,81.369) v1@109.427,81.908 ; 108.445,82.078 cw(c108.828,81.369) v1@109.427,81.908 ; 108.445,82.078 cw(c108.828,81.369) v1@109.427,81.908 ; 108.657,82.349 ccw(c109.228,83.339) v1@109.523,82.235 ; 108.657,82.349 ccw(c109.228,83.339) v1@109.523,82.235 ; 108.657,82.349 ccw(c109.228,83.339) v1@109.523,82.235 ; 108.657,82.349 ccw(c109.228,83.339) v1@109.523,82.235 ; 108.657,82.349 ccw(c109.228,83.339) v1@109.523,82.235 ; 108.657,82.349 ccw(c109.228,83.339) v1@109.523,82.235 ; 108.984,82.38 cw(c109.305,81.801) v1@109.799,82.242 ; 108.984,82.38 cw(c109.305,81.801) v1@109.799,82.242 ; 108.984,82.38 cw(c109.305,81.801) v1@109.799,82.242 ; 109.004,82.38 cw(c109.314,81.806) v1@109.798,82.243 ; 109.004,82.38 cw(c109.314,81.806) v1@109.798,82.243 ; 109.004,82.38 cw(c109.314,81.806) v1@109.798,82.243 ; 109.104,82.537 cw(c109.104,81.571) v1@109.787,82.254 ; 109.104,82.537 cw(c109.104,81.571) v1@109.787,82.254 ; 109.104,82.537 cw(c109.104,81.571) v1@109.787,82.254 ; 109.134,82.525 cw(c109.134,81.601) v1@109.787,82.254 ; 109.134,82.525 cw(c109.134,81.601) v1@109.787,82.254 ; 109.134,82.525 cw(c109.134,81.601) v1@109.787,82.254 ; 109.209,82.588 cw(c109.009,82.241) v1@109.387,82.108 ; 109.209,82.588 cw(c109.009,82.241) v1@109.387,82.108 ; 109.209,82.588 cw(c109.009,82.241) v1@109.387,82.108 ; 109.228,82.577 cw(c109.042,82.253) v1@109.389,82.116 ; 109.228,82.577 cw(c109.042,82.253) v1@109.389,82.116 ; 109.228,82.577 cw(c109.042,82.253) v1@109.389,82.116 ; v1@109.351,82.242 cw(c109.846,81.801) 110.166,82.38 ; v1@109.351,82.242 cw(c109.846,81.801) 110.166,82.38 ; v1@109.351,82.242 cw(c109.846,81.801) 110.166,82.38 ; v1@109.351,82.242 cw(c109.846,81.801) 110.166,82.38 ; v1@109.351,82.242 cw(c109.846,81.801) 110.166,82.38 ; v1@109.351,82.242 cw(c109.846,81.801) 110.166,82.38 ; v1@109.352,82.243 cw(c109.837,81.806) 110.147,82.38 ; v1@109.352,82.243 cw(c109.837,81.806) 110.147,82.38 ; v1@109.352,82.243 cw(c109.837,81.806) 110.147,82.38 ; v1@109.352,82.243 cw(c109.837,81.806) 110.147,82.38 ; v1@109.352,82.243 cw(c109.837,81.806) 110.147,82.38 ; v1@109.352,82.243 cw(c109.837,81.806) 110.147,82.38 ; v1@109.363,82.254 cw(c110.016,81.601) 110.016,82.525 ; v1@109.363,82.254 cw(c110.046,81.572) 110.046,82.537 ; v1@109.363,82.254 cw(c110.016,81.601) 110.016,82.525 ; v1@109.363,82.254 cw(c110.046,81.572) 110.046,82.537 ; v1@109.363,82.254 cw(c110.016,81.601) 110.016,82.525 ; v1@109.363,82.254 cw(c110.046,81.572) 110.046,82.537 ; 109.497,82.537 cw(c109.497,80.363) v1@111.034,81.901 ; 109.497,82.537 cw(c109.497,80.363) v1@111.034,81.901 ; 109.497,82.537 cw(c109.497,80.363) v1@111.034,81.901 ; 109.527,82.525 cw(c109.527,80.394) v1@111.034,81.901 ; 109.527,82.525 cw(c109.527,80.394) v1@111.034,81.901 ; 109.527,82.525 cw(c109.527,80.394) v1@111.034,81.901 ; v1@109.627,82.235 ccw(c109.923,83.339) 110.494,82.349 ; v1@109.627,82.235 ccw(c109.922,83.339) 110.494,82.35 ; v1@109.627,82.235 ccw(c109.923,83.339) 110.494,82.349 ; v1@109.627,82.235 ccw(c109.922,83.339) 110.494,82.35 ; v1@109.627,82.235 ccw(c109.923,83.339) 110.494,82.349 ; v1@109.627,82.235 ccw(c109.922,83.339) 110.494,82.35 ; v1@109.717,81.901 cw(c111.223,80.394) 111.223,82.525 ; v1@109.717,81.901 cw(c111.252,80.368) 111.252,82.537 ; v1@109.717,81.901 cw(c111.223,80.394) 111.223,82.525 ; v1@109.717,81.901 cw(c111.252,80.368) 111.252,82.537 ; v1@109.717,81.901 cw(c111.223,80.394) 111.223,82.525 ; v1@109.717,81.901 cw(c111.252,80.368) 111.252,82.537 ; v1@109.724,81.908 cw(c110.323,81.369) 110.706,82.078 ; v1@109.724,81.909 cw(c110.325,81.374) 110.714,82.077 ; v1@109.724,81.908 cw(c110.323,81.369) 110.706,82.078 ; v1@109.724,81.909 cw(c110.325,81.374) 110.714,82.077 ; v1@109.724,81.908 cw(c110.323,81.369) 110.706,82.078 ; v1@109.724,81.909 cw(c110.325,81.374) 110.714,82.077 ; v1@109.724,81.908 cw(c110.323,81.369) 110.706,82.078 ; v1@109.724,81.909 cw(c110.325,81.374) 110.714,82.077 ; v1@109.724,81.908 cw(c110.323,81.369) 110.706,82.078 ; v1@109.724,81.909 cw(c110.325,81.374) 110.714,82.077 ; v1@109.724,81.908 cw(c110.323,81.369) 110.706,82.078 ; v1@109.724,81.909 cw(c110.325,81.374) 110.714,82.077 ; v1@109.761,82.116 cw(c110.109,82.253) 109.922,82.577 ; v1@109.761,82.116 cw(c110.109,82.253) 109.922,82.577 ; v1@109.761,82.116 cw(c110.109,82.253) 109.922,82.577 ; v1@109.764,82.109 cw(c110.139,82.242) 109.94,82.588 ; v1@109.764,82.109 cw(c110.139,82.242) 109.94,82.588 ; v1@109.764,82.109 cw(c110.139,82.242) 109.94,82.588 ; 110.036,82.078 cw(c110.426,81.374) v1@111.026,81.909 ; 110.036,82.078 cw(c110.426,81.374) v1@111.026,81.909 ; 110.036,82.078 cw(c110.426,81.374) v1@111.026,81.909 ; 110.045,82.078 cw(c110.428,81.369) v1@111.027,81.908 ; 110.045,82.078 cw(c110.428,81.369) v1@111.027,81.908 ; 110.045,82.078 cw(c110.428,81.369) v1@111.027,81.908 ; 110.149,68.21 ccw(c110.49,68.552) v1@110.49,68.069 ; 110.149,68.21 cw(c109.807,67.869) v1@110.29,67.869 ; 110.149,68.21 ccw(c110.49,68.552) v1@110.49,68.069 ; 110.149,68.21 cw(c109.807,67.869) v1@110.29,67.869 ; 110.149,68.21 ccw(c110.49,68.552) v1@110.49,68.069 ; 110.149,68.21 cw(c109.807,67.869) v1@110.29,67.869 ; 110.257,82.349 ccw(c110.828,83.339) v1@111.123,82.235 ; 110.257,82.349 ccw(c110.828,83.339) v1@111.123,82.235 ; 110.257,82.349 ccw(c110.828,83.339) v1@111.123,82.235 ; 110.257,82.349 ccw(c110.828,83.339) v1@111.123,82.235 ; 110.257,82.349 ccw(c110.828,83.339) v1@111.123,82.235 ; 110.257,82.349 ccw(c110.828,83.339) v1@111.123,82.235 ; 110.583,82.38 cw(c110.904,81.801) v1@111.399,82.242 ; 110.583,82.38 cw(c110.904,81.801) v1@111.399,82.242 ; 110.583,82.38 cw(c110.904,81.801) v1@111.399,82.242 ; 110.604,82.38 cw(c110.914,81.806) v1@111.398,82.243 ; 110.604,82.38 cw(c110.914,81.806) v1@111.398,82.243 ; 110.604,82.38 cw(c110.914,81.806) v1@111.398,82.243 ; 110.704,82.537 cw(c110.704,81.571) v1@111.387,82.254 ; 110.704,82.537 cw(c110.704,81.571) v1@111.387,82.254 ; 110.704,82.537 cw(c110.704,81.571) v1@111.387,82.254 ; 110.734,82.525 cw(c110.734,81.601) v1@111.387,82.254 ; 110.734,82.525 cw(c110.734,81.601) v1@111.387,82.254 ; 110.734,82.525 cw(c110.734,81.601) v1@111.387,82.254 ; 110.809,82.588 cw(c110.609,82.241) v1@110.987,82.108 ; 110.809,82.588 cw(c110.609,82.241) v1@110.987,82.108 ; 110.809,82.588 cw(c110.609,82.241) v1@110.987,82.108 ; 110.829,82.577 cw(c110.642,82.253) v1@110.989,82.116 ; 110.829,82.577 cw(c110.642,82.253) v1@110.989,82.116 ; 110.829,82.577 cw(c110.642,82.253) v1@110.989,82.116 ; v1@110.947,82.237 cw(c111.457,81.801) 111.789,82.384 ; v1@110.947,82.237 cw(c111.457,81.801) 111.789,82.384 ; v1@110.947,82.237 cw(c111.457,81.801) 111.789,82.384 ; v1@110.947,82.237 cw(c111.457,81.801) 111.789,82.384 ; v1@110.947,82.237 cw(c111.457,81.801) 111.789,82.384 ; v1@110.947,82.237 cw(c111.457,81.801) 111.789,82.384 ; v1@110.963,82.254 cw(c111.616,81.601) 111.616,82.525 ; v1@110.963,82.254 cw(c111.647,81.571) 111.647,82.537 ; v1@110.963,82.254 cw(c111.616,81.601) 111.616,82.525 ; v1@110.963,82.254 cw(c111.647,81.571) 111.647,82.537 ; v1@110.963,82.254 cw(c111.616,81.601) 111.616,82.525 ; v1@110.963,82.254 cw(c111.647,81.571) 111.647,82.537 ; v1@111.227,82.235 ccw(c111.523,83.339) 112.094,82.349 ; v1@111.227,82.235 ccw(c111.523,83.339) 112.094,82.349 ; v1@111.227,82.235 ccw(c111.523,83.339) 112.094,82.349 ; v1@111.227,82.235 ccw(c111.523,83.339) 112.094,82.349 ; v1@111.227,82.235 ccw(c111.523,83.339) 112.094,82.349 ; v1@111.227,82.235 ccw(c111.523,83.339) 112.094,82.349 ; 111.239,82.525 cw(c111.239,80.656) v1@112.627,81.908 ; 111.239,82.525 cw(c111.239,80.656) v1@112.627,81.908 ; 111.239,82.525 cw(c111.239,80.656) v1@112.627,81.908 ; 111.239,82.525 116.027,82.525 116.205,82.525 ; 111.252,82.537 cw(c111.252,80.721) v1@112.624,81.911 ; 111.252,82.537 cw(c111.252,80.721) v1@112.624,81.911 ; 111.252,82.537 cw(c111.252,80.721) v1@112.624,81.911 ; 111.252,82.537 116.04,82.537 ; v1@111.317,81.901 cw(c112.823,80.394) 112.823,82.525 ; v1@111.317,81.901 cw(c112.854,80.363) 112.854,82.537 ; v1@111.317,81.901 cw(c112.823,80.394) 112.823,82.525 ; v1@111.317,81.901 cw(c112.854,80.363) 112.854,82.537 ; v1@111.317,81.901 cw(c112.823,80.394) 112.823,82.525 ; v1@111.317,81.901 cw(c112.854,80.363) 112.854,82.537 ; v1@111.327,81.912 cw(c111.926,81.399) 112.316,82.085 ; v1@111.327,81.912 cw(c111.926,81.399) 112.316,82.085 ; v1@111.327,81.912 cw(c111.926,81.399) 112.316,82.085 ; v1@111.327,81.912 cw(c111.926,81.399) 112.316,82.085 ; v1@111.327,81.912 cw(c111.926,81.399) 112.316,82.085 ; v1@111.327,81.912 cw(c111.926,81.399) 112.316,82.085 ; v1@111.361,82.116 cw(c111.709,82.253) 111.522,82.577 ; v1@111.361,82.116 cw(c111.709,82.253) 111.522,82.577 ; v1@111.361,82.116 cw(c111.709,82.253) 111.522,82.577 ; v1@111.364,82.108 cw(c111.742,82.241) 111.541,82.588 ; v1@111.364,82.108 cw(c111.742,82.241) 111.541,82.588 ; v1@111.364,82.108 cw(c111.742,82.241) 111.541,82.588 ; 111.636,82.077 cw(c112.026,81.374) v1@112.626,81.909 ; 111.636,82.077 cw(c112.026,81.374) v1@112.626,81.909 ; 111.636,82.077 cw(c112.026,81.374) v1@112.626,81.909 ; 111.645,82.078 cw(c112.028,81.369) v1@112.627,81.908 ; 111.645,82.078 cw(c112.028,81.369) v1@112.627,81.908 ; 111.645,82.078 cw(c112.028,81.369) v1@112.627,81.908 ; 111.887,82.387 ccw(c112.487,83.312) v1@112.731,82.237 ; 111.887,82.387 ccw(c112.487,83.312) v1@112.731,82.237 ; 111.887,82.387 ccw(c112.487,83.312) v1@112.731,82.237 ; 111.91,82.394 ccw(c112.503,83.272) v1@112.732,82.237 ; 111.91,82.394 ccw(c112.503,83.272) v1@112.732,82.237 ; 111.91,82.394 ccw(c112.503,83.272) v1@112.732,82.237 ; 112.184,82.38 cw(c112.505,81.801) v1@112.999,82.242 ; 112.184,82.38 cw(c112.505,81.801) v1@112.999,82.242 ; 112.184,82.38 cw(c112.505,81.801) v1@112.999,82.242 ; 112.204,82.38 cw(c112.514,81.806) v1@112.998,82.243 ; 112.204,82.38 cw(c112.514,81.806) v1@112.998,82.243 ; 112.204,82.38 cw(c112.514,81.806) v1@112.998,82.243 ; 112.347,82.537 cw(c112.347,81.671) v1@113.002,82.239 ; 112.347,82.537 cw(c112.347,81.671) v1@113.002,82.239 ; 112.347,82.537 cw(c112.347,81.671) v1@113.002,82.239 ; 112.364,82.525 cw(c112.364,81.671) v1@112.998,82.243 ; 112.364,82.525 cw(c112.364,81.671) v1@112.998,82.243 ; 112.364,82.525 cw(c112.364,81.671) v1@112.998,82.243 ; 112.518,82.554 cw(c112.358,82.307) v1@112.606,82.149 ; 112.518,82.554 cw(c112.358,82.307) v1@112.606,82.149 ; 112.518,82.554 cw(c112.358,82.307) v1@112.606,82.149 ; v1@112.551,82.242 cw(c113.046,81.801) 113.366,82.38 ; v1@112.551,82.242 cw(c113.046,81.801) 113.366,82.38 ; v1@112.551,82.242 cw(c113.046,81.801) 113.366,82.38 ; v1@112.551,82.242 cw(c113.046,81.801) 113.366,82.38 ; v1@112.551,82.242 cw(c113.046,81.801) 113.366,82.38 ; v1@112.551,82.242 cw(c113.046,81.801) 113.366,82.38 ; v1@112.552,82.243 cw(c113.037,81.806) 113.347,82.38 ; v1@112.552,82.243 cw(c113.037,81.806) 113.347,82.38 ; v1@112.552,82.243 cw(c113.037,81.806) 113.347,82.38 ; v1@112.552,82.243 cw(c113.037,81.806) 113.347,82.38 ; v1@112.552,82.243 cw(c113.037,81.806) 113.347,82.38 ; v1@112.552,82.243 cw(c113.037,81.806) 113.347,82.38 ; v1@112.563,82.254 cw(c113.216,81.601) 113.216,82.525 ; v1@112.563,82.254 cw(c113.247,81.571) 113.247,82.537 ; v1@112.563,82.254 cw(c113.216,81.601) 113.216,82.525 ; v1@112.563,82.254 cw(c113.247,81.571) 113.247,82.537 ; v1@112.563,82.254 cw(c113.216,81.601) 113.216,82.525 ; v1@112.563,82.254 cw(c113.247,81.571) 113.247,82.537 ; 112.697,82.537 cw(c112.697,80.363) v1@114.234,81.901 ; 112.697,82.537 cw(c112.697,80.363) v1@114.234,81.901 ; 112.697,82.537 cw(c112.697,80.363) v1@114.234,81.901 ; 112.727,82.525 cw(c112.727,80.394) v1@114.234,81.901 ; 112.727,82.525 cw(c112.727,80.394) v1@114.234,81.901 ; 112.727,82.525 cw(c112.727,80.394) v1@114.234,81.901 ; v1@112.827,82.235 ccw(c113.123,83.339) 113.694,82.349 ; v1@112.827,82.235 ccw(c113.123,83.339) 113.694,82.349 ; v1@112.827,82.235 ccw(c113.123,83.339) 113.694,82.349 ; v1@112.827,82.235 ccw(c113.123,83.339) 113.694,82.349 ; v1@112.827,82.235 ccw(c113.123,83.339) 113.694,82.349 ; v1@112.827,82.235 ccw(c113.123,83.339) 113.694,82.349 ; v1@112.917,81.901 cw(c114.423,80.394) 114.423,82.525 ; v1@112.917,81.901 cw(c114.454,80.363) 114.454,82.537 ; v1@112.917,81.901 cw(c114.423,80.394) 114.423,82.525 ; v1@112.917,81.901 cw(c114.454,80.363) 114.454,82.537 ; v1@112.917,81.901 cw(c114.423,80.394) 114.423,82.525 ; v1@112.917,81.901 cw(c114.454,80.363) 114.454,82.537 ; v1@112.924,81.908 cw(c113.523,81.369) 113.906,82.078 ; v1@112.924,81.908 cw(c113.523,81.369) 113.906,82.078 ; v1@112.924,81.908 cw(c113.523,81.369) 113.906,82.078 ; v1@112.924,81.908 cw(c113.523,81.369) 113.906,82.078 ; v1@112.924,81.908 cw(c113.523,81.369) 113.906,82.078 ; v1@112.924,81.908 cw(c113.523,81.369) 113.906,82.078 ; v1@112.924,81.909 cw(c113.525,81.374) 113.914,82.077 ; v1@112.924,81.909 cw(c113.525,81.374) 113.914,82.077 ; v1@112.924,81.909 cw(c113.525,81.374) 113.914,82.077 ; v1@112.924,81.909 cw(c113.525,81.374) 113.914,82.077 ; v1@112.924,81.909 cw(c113.525,81.374) 113.914,82.077 ; v1@112.924,81.909 cw(c113.525,81.374) 113.914,82.077 ; v1@112.961,82.116 cw(c113.309,82.253) 113.122,82.577 ; v1@112.961,82.116 cw(c113.309,82.253) 113.122,82.577 ; v1@112.961,82.116 cw(c113.309,82.253) 113.122,82.577 ; v1@112.964,82.108 cw(c113.342,82.241) 113.141,82.588 ; v1@112.964,82.108 cw(c113.342,82.241) 113.141,82.588 ; v1@112.964,82.108 cw(c113.342,82.241) 113.141,82.588 ; 113.236,82.077 cw(c113.626,81.374) v1@114.226,81.909 ; 113.236,82.077 cw(c113.626,81.374) v1@114.226,81.909 ; 113.236,82.077 cw(c113.626,81.374) v1@114.226,81.909 ; 113.245,82.078 cw(c113.628,81.369) v1@114.227,81.908 ; 113.245,82.078 cw(c113.628,81.369) v1@114.227,81.908 ; 113.245,82.078 cw(c113.628,81.369) v1@114.227,81.908 ; 113.457,82.349 ccw(c114.028,83.339) v1@114.323,82.235 ; 113.457,82.349 ccw(c114.028,83.339) v1@114.323,82.235 ; 113.457,82.349 ccw(c114.028,83.339) v1@114.323,82.235 ; 113.457,82.349 ccw(c114.028,83.339) v1@114.323,82.235 ; 113.457,82.349 ccw(c114.028,83.339) v1@114.323,82.235 ; 113.457,82.349 ccw(c114.028,83.339) v1@114.323,82.235 ; 113.784,82.38 cw(c114.105,81.801) v1@114.599,82.242 ; 113.784,82.38 cw(c114.105,81.801) v1@114.599,82.242 ; 113.784,82.38 cw(c114.105,81.801) v1@114.599,82.242 ; 113.804,82.38 cw(c114.114,81.806) v1@114.598,82.243 ; 113.804,82.38 cw(c114.114,81.806) v1@114.598,82.243 ; 113.804,82.38 cw(c114.114,81.806) v1@114.598,82.243 ; 113.904,82.537 cw(c113.904,81.571) v1@114.587,82.254 ; 113.904,82.537 cw(c113.904,81.571) v1@114.587,82.254 ; 113.904,82.537 cw(c113.904,81.571) v1@114.587,82.254 ; 113.934,82.525 cw(c113.934,81.601) v1@114.587,82.254 ; 113.934,82.525 cw(c113.934,81.601) v1@114.587,82.254 ; 113.934,82.525 cw(c113.934,81.601) v1@114.587,82.254 ; 114.009,82.588 cw(c113.809,82.241) v1@114.187,82.108 ; 114.009,82.588 cw(c113.809,82.241) v1@114.187,82.108 ; 114.009,82.588 cw(c113.809,82.241) v1@114.187,82.108 ; 114.028,82.577 cw(c113.842,82.253) v1@114.189,82.116 ; 114.028,82.577 cw(c113.842,82.253) v1@114.189,82.116 ; 114.028,82.577 cw(c113.842,82.253) v1@114.189,82.116 ; v1@114.151,82.242 cw(c114.646,81.801) 114.966,82.38 ; v1@114.151,82.242 cw(c114.646,81.801) 114.966,82.38 ; v1@114.151,82.242 cw(c114.646,81.801) 114.966,82.38 ; v1@114.151,82.242 cw(c114.646,81.801) 114.966,82.38 ; v1@114.151,82.242 cw(c114.646,81.801) 114.966,82.38 ; v1@114.151,82.242 cw(c114.646,81.801) 114.966,82.38 ; v1@114.152,82.243 cw(c114.637,81.806) 114.947,82.38 ; v1@114.152,82.243 cw(c114.637,81.806) 114.947,82.38 ; v1@114.152,82.243 cw(c114.637,81.806) 114.947,82.38 ; v1@114.152,82.243 cw(c114.637,81.806) 114.947,82.38 ; v1@114.152,82.243 cw(c114.637,81.806) 114.947,82.38 ; v1@114.152,82.243 cw(c114.637,81.806) 114.947,82.38 ; v1@114.162,82.253 cw(c114.843,81.58) 114.843,82.537 ; v1@114.162,82.253 cw(c114.843,81.58) 114.843,82.537 ; v1@114.162,82.253 cw(c114.843,81.58) 114.843,82.537 ; v1@114.163,82.254 cw(c114.816,81.601) 114.816,82.525 ; v1@114.163,82.254 cw(c114.816,81.601) 114.816,82.525 ; v1@114.163,82.254 cw(c114.816,81.601) 114.816,82.525 ; 114.297,82.537 cw(c114.297,80.363) v1@115.834,81.901 ; 114.297,82.537 cw(c114.297,80.363) v1@115.834,81.901 ; 114.297,82.537 cw(c114.297,80.363) v1@115.834,81.901 ; 114.327,82.525 cw(c114.327,80.394) v1@115.834,81.901 ; 114.327,82.525 cw(c114.327,80.394) v1@115.834,81.901 ; 114.327,82.525 cw(c114.327,80.394) v1@115.834,81.901 ; v1@114.426,82.235 ccw(c114.715,83.341) 115.292,82.355 ; v1@114.426,82.235 ccw(c114.715,83.341) 115.292,82.355 ; v1@114.426,82.235 ccw(c114.715,83.341) 115.292,82.355 ; v1@114.427,82.235 ccw(c114.723,83.339) 115.294,82.349 ; v1@114.427,82.235 ccw(c114.723,83.339) 115.294,82.349 ; v1@114.427,82.235 ccw(c114.723,83.339) 115.294,82.349 ; v1@114.517,81.901 cw(c116.023,80.394) 116.023,82.525 ; v1@114.517,81.901 cw(c116.04,80.397) 116.04,82.537 ; v1@114.517,81.901 cw(c116.023,80.394) 116.023,82.525 ; v1@114.517,81.901 cw(c116.04,80.397) 116.04,82.537 ; v1@114.517,81.901 cw(c116.023,80.394) 116.023,82.525 ; v1@114.517,81.901 cw(c116.04,80.397) 116.04,82.537 ; v1@114.524,81.908 cw(c115.123,81.369) 115.506,82.078 ; v1@114.524,81.908 cw(c115.123,81.369) 115.506,82.078 ; v1@114.524,81.908 cw(c115.123,81.369) 115.506,82.078 ; v1@114.524,81.908 cw(c115.123,81.369) 115.506,82.078 ; v1@114.524,81.908 cw(c115.123,81.369) 115.506,82.078 ; v1@114.524,81.908 cw(c115.123,81.369) 115.506,82.078 ; v1@114.524,81.909 cw(c115.125,81.374) 115.514,82.077 ; v1@114.524,81.909 cw(c115.125,81.374) 115.514,82.077 ; v1@114.524,81.909 cw(c115.125,81.374) 115.514,82.077 ; v1@114.524,81.909 cw(c115.125,81.374) 115.514,82.077 ; v1@114.524,81.909 cw(c115.125,81.374) 115.514,82.077 ; v1@114.524,81.909 cw(c115.125,81.374) 115.514,82.077 ; v1@114.561,82.116 cw(c114.909,82.253) 114.722,82.577 ; v1@114.561,82.116 cw(c114.909,82.253) 114.722,82.577 ; v1@114.561,82.116 cw(c114.909,82.253) 114.722,82.577 ; v1@114.562,82.112 cw(c114.926,82.25) 114.73,82.585 ; v1@114.562,82.112 cw(c114.926,82.25) 114.73,82.585 ; v1@114.562,82.112 cw(c114.926,82.25) 114.73,82.585 ; 114.835,82.078 cw(c115.225,81.377) v1@115.826,81.909 ; 114.835,82.078 cw(c115.225,81.377) v1@115.826,81.909 ; 114.835,82.078 cw(c115.225,81.377) v1@115.826,81.909 ; 114.845,82.078 cw(c115.228,81.369) v1@115.827,81.908 ; 114.845,82.078 cw(c115.228,81.369) v1@115.827,81.908 ; 114.845,82.078 cw(c115.228,81.369) v1@115.827,81.908 ; 115.057,82.349 ccw(c115.628,83.339) v1@115.923,82.235 ; 115.057,82.349 ccw(c115.628,83.339) v1@115.923,82.235 ; 115.057,82.349 ccw(c115.628,83.339) v1@115.923,82.235 ; 115.057,82.349 ccw(c115.628,83.339) v1@115.923,82.235 ; 115.057,82.349 ccw(c115.628,83.339) v1@115.923,82.235 ; 115.057,82.349 ccw(c115.628,83.339) v1@115.923,82.235 ; 115.379,82.381 cw(c115.702,81.8) v1@116.2,82.241 ; 115.379,82.381 cw(c115.702,81.8) v1@116.2,82.241 ; 115.379,82.381 cw(c115.702,81.8) v1@116.2,82.241 ; 115.404,82.38 cw(c115.714,81.806) v1@116.198,82.243 ; 115.404,82.38 cw(c115.714,81.806) v1@116.198,82.243 ; 115.404,82.38 cw(c115.714,81.806) v1@116.198,82.243 ; 115.504,82.537 cw(c115.504,81.571) v1@116.187,82.254 ; 115.504,82.537 cw(c115.504,81.571) v1@116.187,82.254 ; 115.504,82.537 cw(c115.504,81.571) v1@116.187,82.254 ; 115.534,82.525 cw(c115.534,81.601) v1@116.187,82.254 ; 115.534,82.525 cw(c115.534,81.601) v1@116.187,82.254 ; 115.534,82.525 cw(c115.534,81.601) v1@116.187,82.254 ; 115.609,82.588 cw(c115.409,82.241) v1@115.787,82.108 ; 115.609,82.588 cw(c115.409,82.241) v1@115.787,82.108 ; 115.609,82.588 cw(c115.409,82.241) v1@115.787,82.108 ; 115.629,82.577 cw(c115.442,82.253) v1@115.789,82.116 ; 115.629,82.577 cw(c115.442,82.253) v1@115.789,82.116 ; 115.629,82.577 cw(c115.442,82.253) v1@115.789,82.116 ; v1@115.763,82.254 cw(c116.416,81.601) 116.416,82.525 ; v1@115.763,82.254 cw(c116.447,81.571) 116.447,82.537 ; v1@115.763,82.254 cw(c116.416,81.601) 116.416,82.525 ; v1@115.763,82.254 cw(c116.447,81.571) 116.447,82.537 ; v1@115.763,82.254 cw(c116.416,81.601) 116.416,82.525 ; v1@115.763,82.254 cw(c116.447,81.571) 116.447,82.537 ; v1@115.896,82.226 ccw(c115.685,82.715) 116.218,82.715 ; v1@115.896,82.226 ccw(c115.685,82.715) 116.218,82.715 ; v1@115.896,82.226 ccw(c115.685,82.715) 116.218,82.715 ; v1@115.953,82.241 ccw(c115.919,82.537) 116.218,82.537 ; v1@115.953,82.241 ccw(c115.919,82.537) 116.218,82.537 ; v1@115.953,82.241 ccw(c115.919,82.537) 116.218,82.537 ; v1@116.027,82.235 ccw(c116.323,83.339) 116.894,82.349 ; v1@116.027,82.235 ccw(c116.323,83.339) 116.894,82.349 ; v1@116.027,82.235 ccw(c116.323,83.339) 116.894,82.349 ; v1@116.027,82.235 ccw(c116.323,83.339) 116.894,82.349 ; v1@116.027,82.235 ccw(c116.323,83.339) 116.894,82.349 ; v1@116.027,82.235 ccw(c116.323,83.339) 116.894,82.349 ; 116.04,82.537 116.218,82.537 ; v1@116.117,81.901 cw(c117.623,80.394) 117.623,82.525 ; v1@116.117,81.901 cw(c117.654,80.363) 117.654,82.537 ; v1@116.117,81.901 cw(c117.623,80.394) 117.623,82.525 ; v1@116.117,81.901 cw(c117.654,80.363) 117.654,82.537 ; v1@116.117,81.901 cw(c117.623,80.394) 117.623,82.525 ; v1@116.117,81.901 cw(c117.654,80.363) 117.654,82.537 ; v1@116.15,82.139 cw(c116.434,82.295) 116.205,82.525 ; v1@116.15,82.139 cw(c116.434,82.295) 116.205,82.525 ; v1@116.15,82.139 cw(c116.434,82.295) 116.205,82.525 ; v1@116.153,82.133 cw(c116.464,82.291) 116.218,82.537 ; v1@116.153,82.133 cw(c116.464,82.291) 116.218,82.537 ; v1@116.153,82.133 cw(c116.464,82.291) 116.218,82.537 ; v1@116.161,82.116 cw(c116.509,82.253) 116.322,82.577 ; v1@116.161,82.116 cw(c116.509,82.253) 116.322,82.577 ; v1@116.161,82.116 cw(c116.509,82.253) 116.322,82.577 ; v1@116.164,82.108 cw(c116.542,82.241) 116.341,82.588 ; v1@116.164,82.108 cw(c116.542,82.241) 116.341,82.588 ; v1@116.164,82.108 cw(c116.542,82.241) 116.341,82.588 ; 116.205,82.525 cw(c116.205,80.954) v1@117.444,81.919 ; 116.205,82.525 cw(c116.205,80.954) v1@117.444,81.919 ; 116.205,82.525 cw(c116.205,80.954) v1@117.444,81.919 ; 116.205,82.525 116.218,82.537 ; 116.218,82.537 cw(c116.218,81.012) v1@117.442,81.923 ; 116.218,82.537 cw(c116.218,81.012) v1@117.442,81.923 ; 116.218,82.537 cw(c116.218,81.012) v1@117.442,81.923 ; 116.218,82.537 116.218,82.715 ; 116.446,82.082 cw(c116.841,81.362) v1@117.453,81.909 ; 116.446,82.082 cw(c116.841,81.362) v1@117.453,81.909 ; 116.446,82.082 cw(c116.841,81.362) v1@117.453,81.909 ; 116.455,82.082 cw(c116.843,81.357) v1@117.454,81.908 ; 116.455,82.082 cw(c116.843,81.357) v1@117.454,81.908 ; 116.455,82.082 cw(c116.843,81.357) v1@117.454,81.908 ; v1@116.53,83.218 ccw(c117.138,83.419) 117.138,82.779 ; v1@116.53,83.218 ccw(c117.138,83.419) 117.138,82.779 ; v1@116.53,83.218 ccw(c117.138,83.419) 117.138,82.779 ; 116.839,82.376 ccw(c117.34,83.039) v1@117.551,82.235 ; 116.839,82.376 ccw(c117.34,83.039) v1@117.551,82.235 ; 116.839,82.376 ccw(c117.34,83.039) v1@117.551,82.235 ; v1@116.853,83.116 cw(c116.937,82.691) 117.298,82.929 ; v1@116.853,83.116 cw(c116.937,82.691) 117.298,82.929 ; v1@116.853,83.116 cw(c116.937,82.691) 117.298,82.929 ; 116.858,82.384 ccw(c117.355,83.013) v1@117.553,82.236 ; 116.858,82.384 ccw(c117.355,83.013) v1@117.553,82.236 ; 116.858,82.384 ccw(c117.355,83.013) v1@117.553,82.236 ; 116.997,82.384 cw(c117.322,81.792) v1@117.826,82.242 ; 116.997,82.384 cw(c117.322,81.792) v1@117.826,82.242 ; 116.997,82.384 cw(c117.322,81.792) v1@117.826,82.242 ; v1@117.004,83.375 ccw(c117.831,83.649) 117.831,82.779 ; v1@117.004,83.375 ccw(c117.831,83.649) 117.831,82.779 ; v1@117.004,83.375 ccw(c117.831,83.649) 117.831,82.779 ; 117.017,82.383 cw(c117.331,81.798) v1@117.825,82.243 ; 117.017,82.383 cw(c117.331,81.798) v1@117.825,82.243 ; 117.017,82.383 cw(c117.331,81.798) v1@117.825,82.243 ; 117.213,82.537 cw(c117.213,81.753) v1@117.843,82.221 ; 117.213,82.537 cw(c117.213,81.753) v1@117.843,82.221 ; 117.213,82.537 cw(c117.213,81.753) v1@117.843,82.221 ; 117.228,82.525 cw(c117.228,81.751) v1@117.839,82.226 ; 117.228,82.525 cw(c117.228,81.751) v1@117.839,82.226 ; 117.228,82.525 cw(c117.228,81.751) v1@117.839,82.226 ; 124.003,82.525 124.117,82.639 ; 124.003,82.525 124.003,82.753 124.117,82.639 ; 124.117,82.639 126.024,84.546 C0.2@126.837,84.546 ; 124.434,82.346 cw(c125.628,81.152) v2@125.628,82.841 ; 124.434,82.346 cw(c125.628,81.152) v2@125.628,82.841 ; 124.434,82.346 cw(c125.628,81.152) v2@125.628,82.841 ; 125.238,82.736 ccw(c125.105,83.233) v2@125.55,82.976 ; 125.238,82.736 ccw(c125.105,83.233) v2@125.55,82.976 ; 125.238,82.736 ccw(c125.105,83.233) v2@125.55,82.976 ; 125.499,84.021 cw(c126.163,83.357) C0.2@126.163,84.296 ; 125.499,84.021 cw(c126.163,83.357) C0.2@126.163,84.296 ; 125.499,84.021 cw(c126.163,83.357) C0.2@126.163,84.296 ; C0.2@126.837,84.546 C0.2@126.913,84.546 C0.2@126.913,84.622 ; C0.2@126.837,84.546 C0.2@126.913,84.622 ; v1@105.64,82.159 ccw(c105.851,82.948) 106.26,82.241 cw(c105.851,82.948) v1@105.64,82.159 ; 106.19,82.156 cw(c106.56,81.786) 106.72,82.283 ccw(c106.56,81.786) 106.19,82.156 ; v1@108.153,81.951 cw(c108.618,81.713) 108.618,82.235 ccw(c108.618,81.713) v1@108.153,81.951 ; 108.932,82.235 cw(c108.932,81.713) 109.397,81.951 ccw(c108.932,81.713) 108.932,82.235 ; 110.532,82.235 cw(c110.532,81.713) 110.997,81.951 ccw(c110.532,81.713) 110.532,82.235 ; v1@111.353,81.951 cw(c111.818,81.713) 111.818,82.235 ccw(c111.818,81.713) v1@111.353,81.951 ; v1@112.953,81.951 cw(c113.418,81.713) 113.418,82.235 ccw(c113.418,81.713) v1@112.953,81.951 ; 113.732,82.235 cw(c113.732,81.713) 114.197,81.951 ccw(c113.732,81.713) 113.732,82.235 ; 115.332,82.235 cw(c115.332,81.713) 115.797,81.951 ccw(c115.332,81.713) 115.332,82.235 ; v1@116.153,81.951 cw(c116.618,81.713) 116.618,82.235 ccw(c116.618,81.713) v1@116.153,81.951